# EAGLE board MC10_Tape (EAGLE 6.6.0)
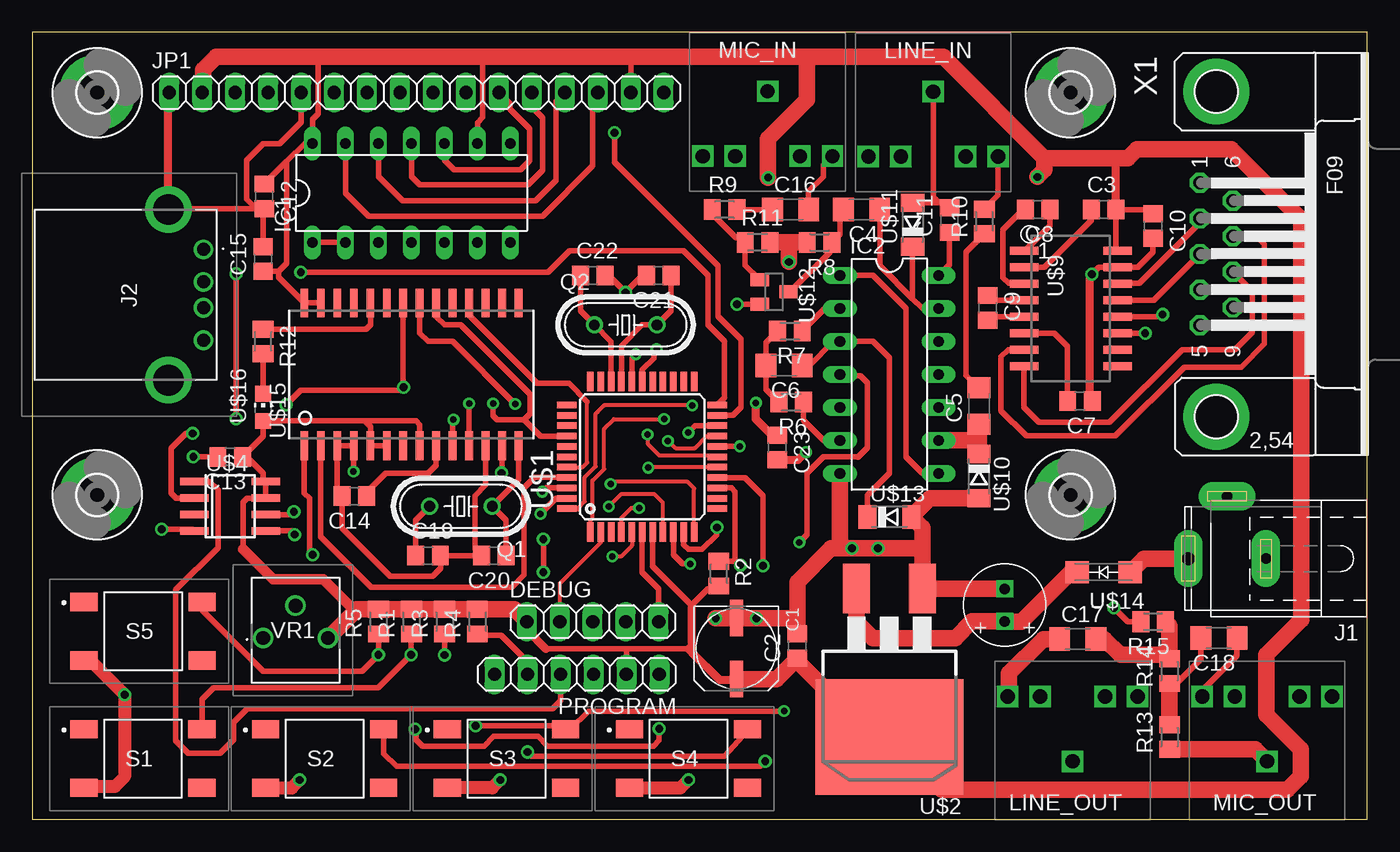
[diagram p0: board, top side]
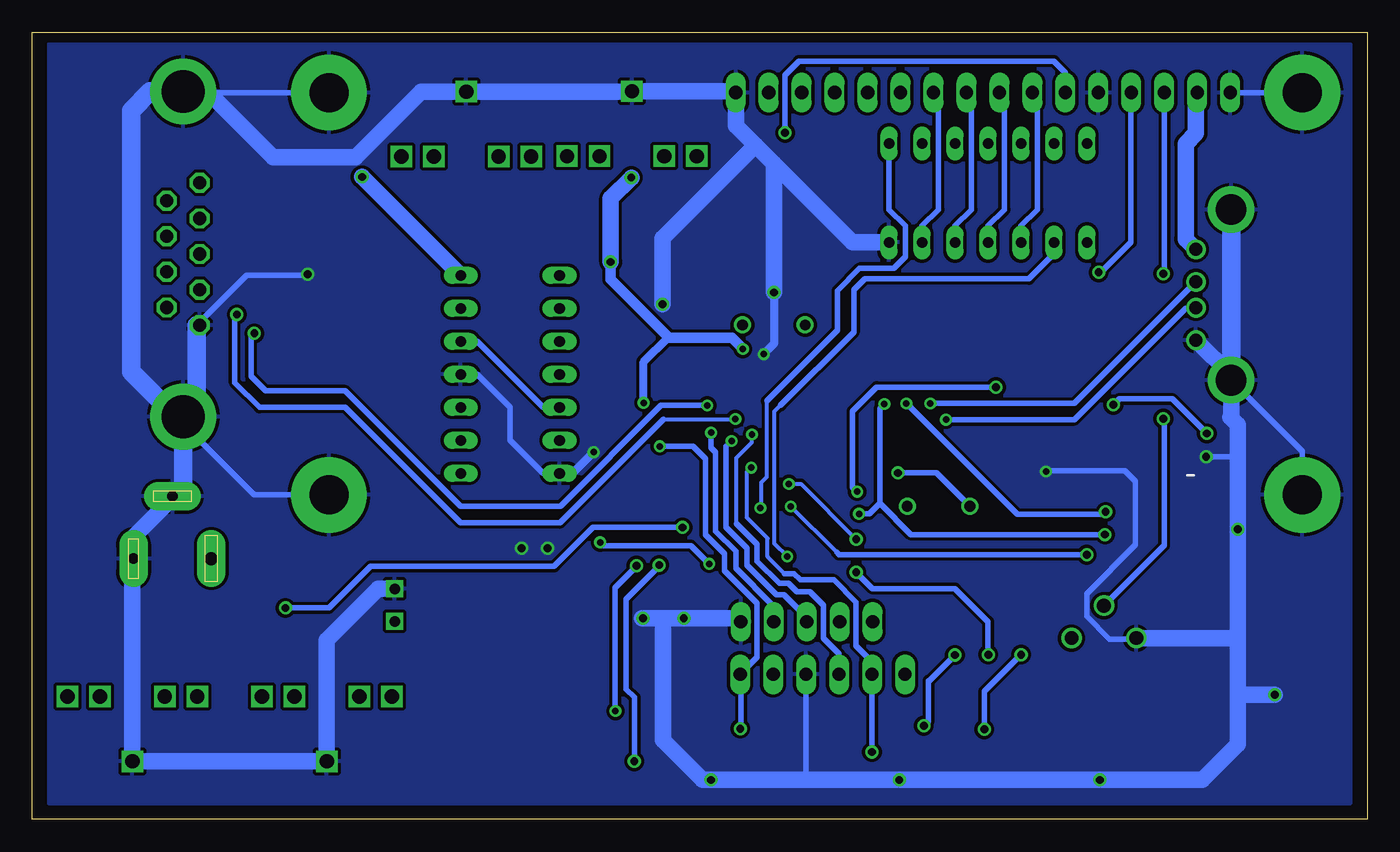
[diagram p1: board, bottom side, seen from below]

Size 102.85 x 60.63 mm. Coordinates in mm from the lower left corner, seen from the top.
Outline: 0,0 102.85,0 102.85,60.63 0,60.63 0,0
Copper layers (1*16): Top 0.035mm / dielectric 1.5mm / Bottom 0.035mm
Design rules "JLC": minimum track width 5mil, minimum drill 0.2mm, track to track 5mil, track to pad 0.2mm, pad to pad 5mil, via to via 0.54mm, smd to smd 0.003225mm, copper to edge 0.2mm, drill to drill 0.54mm, minimum pad ring 10mil, minimum via ring 8mil, stop-mask expansion 4mil, vias tented up to drill 0mil, thermal gap 10mil

## Footprints (pad centres in the part's own frame; a part is rotated, then mirrored left to right if it is on the bottom)
UD-6,3X5,8_NICHICON = smd 2.8 x 1: + 2.35,0; - -2.35,0
C0805 = smd 1.3 x 1.5: 1 -0.95,0; 2 0.95,0
C1206 = smd 1.6 x 1.8: 1 -1.4,0; 2 1.4,0
1X05 = drill 1.016 long: 1 -5.08,0; 2 -2.54,0; 3 0,0; 4 2.54,0; 5 5.08,0
3,0-PAD = drill 3 pad 5.842: B3,0 0,0
DIL14 = drill 0.813 long: 1 -7.62,-3.81; 2 -5.08,-3.81; 3 -2.54,-3.81; 4 0,-3.81; 5 2.54,-3.81; 6 5.08,-3.81; 7 7.62,-3.81; 8 7.62,3.81; 9 5.08,3.81; 10 2.54,3.81; 11 0,3.81; 12 -2.54,3.81; 13 -5.08,3.81; 14 -7.62,3.81
SPC4077 = drill 0.8 pad 2.184 long: 1 -3,0; 2 0,-4.8 | drill 1 pad 2.184 long: 3 3,0
875200010BLF = drill 1 pad 1.5: 1 0,0; 2 2.5,0; 3 4.5,0; 4 7,0 | drill 2.38 pad 3.57: MH1 -3.07,-2.71; MH2 10.07,-2.71
1X16 = drill 1.016 long: 1 -19.05,0; 2 -16.51,0; 3 -13.97,0; 4 -11.43,0; 5 -8.89,0; 6 -6.35,0; 7 -3.81,0; 8 -1.27,0; 9 1.27,0; 10 3.81,0; 11 6.35,0; 12 8.89,0; 13 11.43,0; 14 13.97,0; 15 16.51,0; 16 19.05,0
3.5_AUDIO = drill 1.1 square: RING 5,-5; RING_SWITCH 2.5,-5; SLEEVE 0,0; TIP -5,-5; TIP_SWITCH -2.5,-5
1X06 = drill 1.016 long: 1 -6.35,0; 2 -3.81,0; 3 -1.27,0; 4 1.27,0; 5 3.81,0; 6 6.35,0
HC49/S = drill 0.813: 1 -2.413,0; 2 2.413,0
M0805 = smd 1.3 x 1.6: 1 -0.95,0; 2 0.95,0
LL3301NF065QG = smd 2.1 x 1.4: 1 -4.55,2.25; 2 4.55,2.25; 3 -4.55,-2.25; 4 4.55,-2.25
TQFP44 = smd 1.5 x 0.5: 1 -5.8,4; 2 -5.8,3.2; 3 -5.8,2.4; 4 -5.8,1.6; 5 -5.8,0.8; 6 -5.8,0; 7 -5.8,-0.8; 8 -5.8,-1.6; 9 -5.8,-2.4; 10 -5.8,-3.2; 11 -5.8,-4; 23 5.8,-4; 24 5.8,-3.2; 25 5.8,-2.4; 26 5.8,-1.6; 27 5.8,-0.8; 28 5.8,0; 29 5.8,0.8; 30 5.8,1.6; 31 5.8,2.4; 32 5.8,3.2; 33 5.8,4 | smd 0.5 x 1.5: 12 -4,-5.8; 13 -3.2,-5.8; 14 -2.4,-5.8; 15 -1.6,-5.8; 16 -0.8,-5.8; 17 0,-5.8; 18 0.8,-5.8; 19 1.6,-5.8; 20 2.4,-5.8; 21 3.2,-5.8; 22 4,-5.8; 34 4,5.8; 35 3.2,5.8; 36 2.4,5.8; 37 1.6,5.8; 38 0.8,5.8; 39 0,5.8; 40 -0.8,5.8; 41 -1.6,5.8; 42 -2.4,5.8; 43 -3.2,5.8; 44 -4,5.8
D2PACK = smd 2.083 x 3.81: 1 -2.54,-8.89; 3 2.54,-8.89 | smd 11.43 x 8.89: 2 0,2.54
NXA_35V100_6.3X11 = drill 0.8 square: P$1 -1.25,0; P$2 1.25,0
SO08 = smd 0.6 x 2.2: 1 -1.905,-2.75; 2 -0.635,-2.75; 3 0.635,-2.75; 4 1.905,-2.75; 5 1.905,2.75; 6 0.635,2.75; 7 -0.635,2.75; 8 -1.905,2.75
SOP16 = smd 0.6 x 2.2: 1 -4.445,-3.6; 2 -3.175,-3.6; 3 -1.905,-3.6; 4 -0.635,-3.6; 5 0.635,-3.6; 6 1.905,-3.6; 7 3.175,-3.6; 8 4.445,-3.6; 9 4.445,3.6; 10 3.175,3.6; 11 1.905,3.6; 12 0.635,3.6; 13 -0.635,3.6; 14 -1.905,3.6; 15 -3.175,3.6; 16 -4.445,3.6
SOD80C = smd 1.4 x 1.8: A 1.7,0; C -1.7,0
SOT23 = smd 1 x 1.4: 1 -0.95,-1.1; 2 0.95,-1.1; 3 0,1.1
SMA-DO214AC = smd 1.8 x 1.7: A -2.05,0; K 2.05,0
SOP28 = smd 0.6 x 2.2: 1 -6.985,-5.5; 2 -5.715,-5.5; 3 -4.445,-5.5; 4 -3.175,-5.5; 5 -1.905,-5.5; 6 -0.635,-5.5; 7 0.635,-5.5; 8 1.905,-5.5; 9 3.175,-5.5; 10 4.445,-5.5; 11 5.715,-5.5; 12 6.985,-5.5; 13 8.255,-5.5; 14 9.525,-5.5; 15 9.525,5.5; 16 8.255,5.5; 17 6.985,5.5; 18 5.715,5.5; 19 4.445,5.5; 20 3.175,5.5; 21 1.905,5.5; 22 0.635,5.5; 23 -0.635,5.5; 24 -1.905,5.5; 25 -3.175,5.5; 26 -4.445,5.5; 27 -5.715,5.5; 28 -6.985,5.5
CHIP-LED0805 = smd 1.2 x 1.2: A 0,-1.05; C 0,1.05
3306P1104 = drill 1.05 pad 1.575: 1 0,0; 2 2.5,2.5; 3 5,0
F09HP = drill 1.016 octagon: 1 -5.486,-1.27; 2 -2.743,-1.27; 3 0,-1.27; 4 2.743,-1.27; 5 5.486,-1.27; 6 -4.115,1.27; 7 -1.372,1.27; 8 1.372,1.27; 9 4.115,1.27 | drill 3.302 pad 5.08: G1 -12.522,0; G2 12.522,0

## Placement (x,y rotation side)
C1  [UD-6,3X5,8_NICHICON]  54.24,13.16 270 top
C2  104  [C0805]  58.94,13.37 90 top
C3  104  [C0805]  82.55,46.99 0 top
C4  106  [C1206]  63.9,46.99 180 top
C5  106  [C1206]  72.94,31.85 90 top
C6  106  [C1206]  57.92,34.97 180 top
C7  104  [C0805]  80.72,32.24 180 top
C8  104  [C0805]  77.47,46.99 180 top
C9  104  [C0805]  73.61,39.42 270 top
C10  104  [C0805]  86.36,45.72 270 top
C11  104  [C0805]  70.67,46.17 90 top
C12  104  [C0805]  17.87,48.01 270 top
C13  104  [C0805]  15.24,27.94 180 top
C14  104  [C0805]  24.81,24.91 180 top
C15  104  [C0805]  17.78,43.18 90 top
C16  106  [C1206]  58.42,46.99 0 top
C17  106  [C1206]  80.55,13.9 0 top
C18  106  [C1206]  91.44,13.97 180 top
C19  22p  [C0805]  30.48,20.32 0 top
C20  22p  [C0805]  35.56,20.32 180 top
C21  22p  [C0805]  48.26,41.91 180 top
C22  22p  [C0805]  43.18,41.91 0 top
C23  104  [C0805]  57.4,28.66 270 top
DEBUG  [1X05]  43.18,15.24 0 top
H1  MOUNT-PAD-ROUND3.0  [3,0-PAD]  80,25 0 top
H2  MOUNT-PAD-ROUND3.0  [3,0-PAD]  80,56 0 top
H3  MOUNT-PAD-ROUND3.0  [3,0-PAD]  5,25 0 top
H4  MOUNT-PAD-ROUND3.0  [3,0-PAD]  5,56 0 top
IC1  74164N  [DIL14]  29.21,48.26 0 top
IC2  7414N  [DIL14]  66.04,34.29 270 top
J1  [SPC4077]  92.06,20.1 180 top
J2  87520-0010BLF  [875200010BLF]  13.19,43.92 270 top
JP1  [1X16]  29.6,56 0 top
LINE_IN  3.5_AUDIO  [3.5_AUDIO]  69.42,56.07 0 top
LINE_OUT  3.5_AUDIO  [3.5_AUDIO]  80.16,4.48 180 top
MIC_IN  3.5_AUDIO  [3.5_AUDIO]  56.65,56.1 0 top
MIC_OUT  3.5_AUDIO  [3.5_AUDIO]  95.15,4.48 180 top
PROGRAM  [1X06]  41.96,11.18 180 top
Q1  [HC49/S]  33.02,24.13 180 top
Q2  [HC49/S]  45.72,38.1 0 top
R1  1k  [M0805]  29.21,15.24 90 top
R2  1k  [M0805]  52.89,18.94 270 top
R3  1k  [M0805]  31.77,15.24 90 top
R4  1k  [M0805]  34.29,15.24 90 top
R5  1k  [M0805]  26.67,15.24 90 top
R6  1k  [M0805]  58.47,32.16 180 top
R7  1k  [M0805]  58.37,37.63 180 top
R8  470  [M0805]  60.66,44.45 180 top
R9  470  [M0805]  53.34,46.99 0 top
R10  470  [M0805]  73.36,46.07 90 top
R11  120k  [M0805]  55.88,44.45 0 top
R12  470  [M0805]  17.78,36.83 270 top
R13  1k  [M0805]  87.63,6.35 90 top
R14  4k7  [M0805]  87.63,11.43 90 top
R15  10k  [M0805]  86.36,15.24 180 top
S1  LL3301NF065QG  [LL3301NF065QG]  8.52,4.69 0 top
S2  LL3301NF065QG  [LL3301NF065QG]  22.52,4.69 0 top
S3  LL3301NF065QG  [LL3301NF065QG]  36.53,4.69 0 top
S4  LL3301NF065QG  [LL3301NF065QG]  50.56,4.69 0 top
S5  LL3301NF065QG  [LL3301NF065QG]  8.53,14.5 0 top
U$1  PIC16F747-IPT  [TQFP44]  46.99,27.94 90 top
U$2  LM1086  [D2PACK]  66.04,8.89 180 top
U$3  NXA_35V100_6.3X11  [NXA_35V100_6.3X11]  74.93,16.51 270 top
U$4  23LC512T-ISN  [SO08]  15.24,24.13 270 top
U$9  SP232  [SOP16]  80.01,39.37 270 top
U$10  ZMM2V2  [SOD80C]  72.94,26.45 270 top
U$11  ZMM2V2  [SOD80C]  67.83,45.82 90 top
U$12  PMBT3904  [SOT23]  57.15,40.64 270 top
U$13  ZMM2V2  [SOD80C]  66.04,23.31 0 top
U$14  SS24  [SMA-DO214AC]  82.55,19.05 180 top
U$15  CH376S  [SOP28]  27.94,34.29 0 top
U$16  LED_0805  [CHIP-LED0805]  17.78,31.75 0 top
VR1  3306P-1-473  [3306P1104]  17.78,13.97 0 top
X1  [F09HP]  91.23,43.56 270 top

## Library data of the parts
C1-C23 R1-R15 = rcl
DEBUG JP1 PROGRAM = pinhead
H1-H4 = holes
IC1 IC2 = 74xx-us
J1 = con-jack; OC_FARNELL: unknown; OC_NEWARK: unknown
J2 = Signetics; DESCRIPTION: USB 2.0 Type A receptacle white; HEIGHT: 7.8mm; MANUFACTURER_NAME: Amphenol; MANUFACTURER_PART_NUMBER: 87520-0010BLF; MOUSER_PART_NUMBER: 649-87520-0010BLF; MOUSER_PRICE-STOCK: https://www.mouser.co.uk/ProductDetail/Amphenol-FCI/87520-0010BLF?qs=x6EjVpvqMVP%2F2to87x7cdQ%3D%3D
LINE_IN LINE_OUT MIC_IN MIC_OUT U$1-U$4 U$9-U$16 = Signetics
Q1 Q2 = crystal; OC_FARNELL: 1667008; OC_NEWARK: unknown
S1-S5 = Signetics; DESCRIPTION: E-SWITCH - LL3301NF065QG - TACTILE SW, SPST, 0.05A, 12VDC, SOLDER; HEIGHT: 4mm; MANUFACTURER_NAME: E-Switch; MANUFACTURER_PART_NUMBER: LL3301NF065QG; MOUSER_PART_NUMBER: 612-LL3301NF065QG; MOUSER_PRICE-STOCK: https://www.mouser.co.uk/ProductDetail/E-Switch/LL3301NF065QG?qs=QtyuwXswaQiWhwgY68YTTw%3D%3D
VR1 = Signetics; DESCRIPTION: Trimmer Resistors - Through Hole TRIMMER -SMD 6MM RD ST CERMET OPEN FRAME; HEIGHT: 8.38mm; MANUFACTURER_NAME: Bourns; MANUFACTURER_PART_NUMBER: 3306P-1-473; MOUSER_PART_NUMBER: 652-3306P-1-473; MOUSER_PRICE-STOCK: https://www.mouser.co.uk/ProductDetail/Bourns/3306P-1-473?qs=BJlw7L4Cy79OzIXLuBSy4A%3D%3D
X1 = Signetics; OC_FARNELL: unknown; OC_NEWARK: unknown

## Nets
5V0: C1.+ C2.1 C3.2 C10.1 C11.1 C12.1 C13.1 C15.1 C23.1 DEBUG.1 IC1.9 IC1.14 IC2.14 J2.1 JP1.2 JP1.15 PROGRAM.2 R1.2 R2.2 R3.2 R4.2 R5.2 R8.2 R11.2 U$1.7 U$1.28 U$2.2 U$4.7 U$4.8 U$9.16 U$15.5 U$15.6 U$15.8 U$15.27 U$15.28 U$16.A VR1.3
CTS: U$9.10
D0: IC1.3 JP1.7
D1: IC1.4 JP1.8
D2: IC1.5 JP1.9
D3: IC1.6 JP1.10
D4: IC1.10 JP1.11
D5: IC1.11 JP1.12
D6: IC1.12 JP1.13
D7: IC1.13 JP1.14
DEBUG: DEBUG.2 U$1.2
DISP_CLK: IC1.8 U$1.4
DISP_DATA: IC1.1 IC1.2 U$1.5
E: JP1.6 U$1.21
GND: C1.- C2.2 C7.1 C10.2 C11.2 C12.2 C13.2 C14.2 C15.2 C19.2 C20.2 C21.2 C22.2 C23.2 DEBUG.5 H1.B3,0 H2.B3,0 H3.B3,0 H4.B3,0 IC1.7 IC2.7 IC2.11 J1.1 J1.2 J2.4 J2.MH1 J2.MH2 JP1.1 JP1.5 JP1.16 LINE_IN.SLEEVE LINE_OUT.SLEEVE MIC_IN.SLEEVE MIC_OUT.SLEEVE PROGRAM.3 R13.1 S1.3 S2.3 S3.3 S4.3 S5.3 U$1.6 U$1.29 U$2.1 U$3.P$1 U$4.4 U$9.15 U$10.A U$11.A U$12.2 U$13.A U$15.3 U$15.4 U$15.12 VR1.1 X1.5 X1.G1 X1.G2
LINE_IN: LINE_IN.RING R10.2
LINE_OUT: C17.1 LINE_OUT.RING
MIC_IN: C16.2 MIC_IN.RING
MIC_OUT: C18.1 MIC_OUT.RING
MISO: U$1.42 U$4.2 U$15.22
MOSI: U$1.43 U$4.5 U$15.21
N$1: C5.1 IC2.9 U$10.C
N$2: U$2.3 U$3.P$2 U$14.K
N$3: C6.1 IC2.3 U$13.C
N$4: IC2.1 IC2.8
N$5: IC2.5 IC2.12
N$6: C14.1 U$15.9
N$7: C4.2 R8.1 U$12.3
N$8: C4.1 IC2.13 U$11.C
N$9: R9.1 R11.1 U$12.1
N$10: C17.2 R14.2 R15.1
N$11: R12.2 U$16.C
N$12: C16.1 R9.2
N$13: IC2.6 R6.1
N$14: C6.2 R6.2 R7.2
N$15: IC2.2 R7.1
N$16: C18.2 R13.2 R14.1
N$17: C21.1 Q2.2 U$1.30
N$18: C20.1 Q1.1 U$15.14
N$19: C19.1 Q1.2 U$15.13
N$20: C22.1 Q2.1 U$1.31
N$21: R12.1 U$15.24
N$58: J1.3 U$14.A
N$59: C8.2 U$9.3
N$60: C8.1 U$9.1
N$61: C9.2 U$9.5
N$62: C9.1 U$9.4
N$64: C3.1 U$9.2
N$65: C7.2 U$9.6
N$68: C5.2 R10.1
RS: JP1.4 U$1.22
RS232_CTS: U$9.7 X1.7
RS232_RTS: U$9.8 X1.8
RS232_RXD: U$9.13 X1.3
RS232_TXD: U$9.14 X1.2
RTS: U$9.9
RXD: U$1.1 U$9.12
S_RX: DEBUG.4 U$1.20
S_TX: DEBUG.3 U$1.19
SCK: U$1.37 U$4.6 U$15.20
SW0: R1.1 S1.2 U$1.11
SW1: R2.1 S2.2 U$1.14
SW2: R3.1 S3.2 U$1.15
SW3: PROGRAM.5 R4.1 S4.2 U$1.16
TAPE_IN: IC2.4 U$1.9
TAPE_OUT: R15.2 U$1.10
TXD: U$1.44 U$9.11
USB_CS: U$1.40 U$15.18
USB_D+: J2.3 U$15.10
USB_D-: J2.2 U$15.11
USB_INT: U$1.8 U$15.1
USB_RST: U$1.41 U$15.2
V0: JP1.3 VR1.2
~RAM_CS: PROGRAM.4 U$1.17 U$4.1
~RESET: PROGRAM.1 R5.1 S5.2 U$1.18

## Tracks (layer width: path | path; a pad name or v marks a point on that pad's centre or on a via)
5V0  (via drill 0.5, 0.5 pad 0.25, 0.6)
  Top 0.406: JP1.15 46.11,58.46 46.4,58.75 | IC1.9 34.29,53.69 34.7,54.1 34.7,58.6 34.55,58.75 | JP1.2 13.19,55.9 | 19.6,50.69 20.98,52.07 IC1.14 21.59,53.94 22,54.35 22,58.7 22.05,58.75 | 19.6,50.69 C12.1 | C15.1 18.98,42.23 | 18.98,42.23 19.6,42.85 19.6,50.69 | C11.1 70.67,42.73 IC2.14 | U$15.27 U$15.28 18.98,41.77 18.98,42.23 | 25.7,30.6 25.6,30.7 U$16.A 17.78,29.53 C13.1 16.51,27.94 17.78,26.67 17.78,26.25 U$4.8 U$4.7 16.57,24.77 16.25,24.45 16.25,20.8 | 25.7,30.6 26.05,30.25 26.05,28.8 U$15.5 U$15.6 | U$15.8 29.84,30.41 29.55,30.7 25.8,30.7 25.7,30.6 | U$1.7 47.79,19.52 50.8,16.51 52.07,17.78 52.68,17.78 R2.2 | 54.18,10.75 C1.+ | DEBUG.1 38.1,14.6 | U$1.28 46.99,34.64 47.9,35.55 47.9,36.05 v48.1,36.25 | U$9.16 83.5,43.92 C3.2 86.04,46.99 C10.1 | 39.55,13.15 45.72,13.15 | 45.72,13.15 50.55,13.15 | PROGRAM.2 45.77,13.1 45.72,13.15
  Top 0.61: 50.8,16.51 50.8,12.9 | 50.8,12.9 52.95,10.75 54.18,10.75 | 38.1,14.6 39.55,13.15 | C23.1 56.99,29.61 55.75,30.85 v55.75,32.1 | C3.2 83.5,50.63 83.82,50.95 | 50.55,13.15 50.8,12.9
  Top 0.813: 24.86,16.05 22.4,18.5 19.25,18.5 18.55,18.5 16.25,20.8
  Top 1.27: C1.+ 57.33,10.81 C2.1 58.94,12.18 64.77,6.35 U$2.2 70.09,2.3 96.7,2.3 97.75,3.35 97.75,5.4 95.1,8.05 95.1,12.7 97.8,15.4 97.8,46.25 92.4,51.65 85.1,51.65 84.4,50.95 83.82,50.95 78,50.95 | VR1.3 24.86,16.05 25,16.19 R5.2 R1.2 R3.2 R4.2 37.15,16.19 DEBUG.1 | 78,50.95 70.2,58.75 59.69,58.75 | 59.69,58.75 46.4,58.75 34.55,58.75 22.05,58.75 14.15,58.75 13.15,57.75 13.15,56.06 JP1.2 | v56.7,49.45 56.7,52.45 59.69,55.44 59.69,58.75 | R11.2 58.42,44.45 | 58.42,44.45 R8.2 | v58.3,42.95 58.3,44.33 58.42,44.45 | 78,50.95 78,50.05 v77.45,49.5
  Bottom 0.406: 13.19,55.9 JP1.2
  Bottom 0.61: v55.75,32.1 55.75,35.25 53.85,37.15
  Bottom 0.813: v58.3,42.95 58.3,41.6 53.85,37.15 53.8,37.1 48.95,37.1 v48.1,36.25
  Bottom 1.27: v58.3,42.95 58.3,47.85 v56.7,49.45 | v77.45,49.5 v77.44,49.5 IC2.14 | 13.19,55.9 13.19,52.85 13.97,52.07 13.97,44.7 J2.1
D0
  Bottom 0.406: IC1.3 26.67,45.72 25.4,46.99 25.4,55.61 JP1.7
D1
  Bottom 0.406: IC1.4 29.21,45.72 27.94,46.99 27.94,55.61 JP1.8
D2
  Bottom 0.406: IC1.5 31.75,45.72 30.48,46.99 30.48,55.61 JP1.9
D3
  Bottom 0.406: IC1.6 34.29,45.72 33.02,46.99 33.02,55.61 JP1.10
D4
  Top 0.406: JP1.11 36.8,55.15 36.8,54.7 38.3,53.2 38.3,50.75 37.6,50.05 32.5,50.05 31.75,50.8 IC1.10
D5
  Top 0.406: JP1.12 38.6,55.89 38.6,54.75 39.3,54.05 39.3,50 38.2,48.9 29.84,48.9 29.21,49.53 IC1.11
D6
  Top 0.406: JP1.13 40.35,55.32 40.35,49.25 38.76,47.66 28.54,47.66 26.67,49.53 IC1.12
D7
  Top 0.406: JP1.14 43.18,55.61 43.18,50.35 39.32,46.49 25.9,46.49 24.13,48.26 IC1.13
DEBUG
  Top 0.305: DEBUG.2 40.64,18.19 43.8,21.35 U$1.2
DISP_CLK  (via drill 0.5)
  Top 0.305: U$1.4 45.39,23.24 46.15,24 v46.75,24
  Bottom 0.305: 46.25,32.25 46.25,26.4 46.7,25.95 46.7,24.05 v46.75,24
  Bottom 0.406: IC1.8 36.83,46.99 35.56,45.72 35.56,43.34 36.45,42.45 39.1,42.45 40.8,40.75 40.8,37.7 46.25,32.25
DISP_DATA  (via drill 0.5)
  Top 0.305: U$1.5 46.19,21.09 45.35,20.25 v44.69,20.25 v44.68,20.26
  Top 0.406: IC1.1 IC1.2
  Bottom 0.305: 45.2,31.9 45.7,31.4 45.7,21.28 v44.68,20.26
  Bottom 0.406: IC1.2 24.13,43.57 26.05,41.65 38.7,41.65 39.55,40.8 39.55,37.55 45.2,31.9
E  (via drill 0.6)
  Top 0.406: U$1.21 54,31.14 54.61,31.75 54.61,36.99 52.85,38.75 52.85,42.65 44.85,50.65 v44.85,52.9
  Bottom 0.406: JP1.6 23.25,57.54 24.13,58.42 43.78,58.42 44.85,57.35 v44.85,52.9
GND  (via drill 0.5, 0.6)
  Top 0.406: C15.2 17.78,46.97 C12.2 | JP1.5 20.71,53.73 19.05,52.07 17.78,52.07 16.51,50.8 16.51,47.79 17.3,47 17.81,47 C12.2 | 10.48,55.93 JP1.1 | C12.2 10.55,47.06 J2.MH1 | U$11.A 69.85,47.52 | 69.85,47.52 70.27,47.52 C11.2 | LINE_IN.SLEEVE 69.42,47.95 69.85,47.52 | C20.2 C19.2 31.45,20.3 31.45,19.35 30.85,18.75 27.55,18.75 23.86,22.44 C14.2 23.5,25.27 U$15.3 U$15.4 24.75,28.77 v24.75,26.8 | U$1.6 46.99,19.05 48.26,17.78 DEBUG.5 | U$12.2 v54.3,39.7 | C22.2 44.39,41.91 v45.7,40.6 47.01,41.91 C21.2 | U$15.12 34.92,25.77 34.1,24.95 34.1,20.83 C20.2 | 34.29,20.64 C20.2 | v9.95,22.35 12.37,22.35 U$4.4 | C13.2 v12.41,27.94 v12.4,27.95 | U$1.29 46.19,35.54 v46.5,35.85 | C10.2 86.36,43.71 85.2,42.55 U$9.15 82.2,42.55 v81.65,42 81.67,41.98
  Top 0.61: J2.MH1 10.48,55.93 | C23.2 59.01,27.71 v59.6,28.3 | 81.67,41.98 81.45,41.76 81.45,32.46 C7.1
  Top 1.016: S2.3 19.99,2.44 v20.6,3.05 | v36.05,3.05 35.44,2.44 S3.3 | S4.3 49.94,2.44 v50.55,3.05 | S1.3 4.07,2.54 6.35,2.54 7.11,3.3 v7.11,9.6 4.46,12.25 S5.3
  Top 1.27: U$3.P$1 68.6,17.76 U$2.1 68.58,21 | 68.58,21 68.58,22.47 U$13.A 69.18,24.75 U$10.A | C2.2 58.94,15.65 | 58.94,15.65 58.94,18.29 61.55,20.9 62.23,20.9 | 62.23,20.9 v63.15,20.9 v65.15,20.9 68.48,20.9 68.58,21 | IC2.7 62.23,20.9 | R13.1 94.23,5.4 MIC_OUT.SLEEVE | 58.94,15.65 58.79,15.5 v55.8,15.5 | v55.8,15.5 v52.65,15.5 | v55.8,15.5 C1.-
  Bottom 0.406: v12.4,27.95 9.96,27.95 9.95,27.94 | VR1.1 17.85,13.9 19.85,13.9 21.6,15.65 21.6,17.4 17.85,21.15 17.85,26.05 18.65,26.85 24.7,26.85 v24.75,26.8 | H3.B3,0 5,28.37 J2.MH2 | H4.B3,0 JP1.1 | H2.B3,0 91.15,56 X1.G1 | H1.B3,0 85.75,25 91.23,30.48 | IC2.11 68.58,34.29 66.04,31.75 66.04,29.21 63.5,26.67 IC2.7 | PROGRAM.3 43.23,3.1 43.18,3.05 | X1.5 89.96,38.31 86.36,41.91 81.74,41.91 v81.65,42
  Bottom 0.61: IC2.7 61.23,26.67 v59.6,28.3 | v45.7,40.6 45.7,36.65 v46.5,35.85
  Bottom 1.27: J1.2 92.06,24.78 95.25,21.59 95.25,20.29 J1.1 95.15,20.01 MIC_OUT.SLEEVE LINE_OUT.SLEEVE 80.16,13.82 76.2,17.78 74.95,17.78 U$3.P$1 | X1.5 90.2,38.07 | X1.G1 89.38,56.08 84.3,51 77.95,51 72.9,56.05 71.2,56.05 71.18,56.07 LINE_IN.SLEEVE 56.68,56.07 MIC_IN.SLEEVE 48.75,56.1 JP1.16 48.65,53.45 47.13,51.93 | IC1.7 39.65,44.45 45.7,50.5 | 45.7,50.5 47.13,51.93 | v45.7,40.6 45.7,50.5 | 9.95,13.97 v9.95,22.35 9.95,27.94 9.95,30.4 10.55,31 10.48,31.07 J2.MH2 | 9.95,13.97 9.95,9.5 | 9.95,9.5 9.95,5.8 12.7,3.05 v20.6,3.05 v36.05,3.05 43.18,3.05 v50.55,3.05 51.2,3.05 54.25,6.1 C1.- 52.72,15.5 v52.65,15.5 | VR1.1 9.95,13.97 | v7.11,9.6 9.85,9.6 9.95,9.5 | v54.3,39.7 54.3,44.76 47.13,51.93 | 10.48,34.21 J2.4 | v52.65,15.5 48.52,15.5 DEBUG.5 | 55.87,15.5 v52.65,15.5
  Bottom 1.422: J2.MH2 10.48,34.21 J2.MH1 | J1.2 91.23,24.9 91.23,30.48 | 91.23,30.48 X1.G2 90.2,32.07 90.2,38.07 | X1.G1 93.78,56.08 95.25,54.61 95.25,34.5 91.23,30.48
  pour Bottom (isolate 0.254): 1.27,59.69 101.6,59.69 101.6,1.27 1.27,1.27
LINE_IN
  Top 0.406: LINE_IN.RING 74.42,48.08 R10.2
LINE_OUT
  Top 1.27: C17.1 77.9,13.9 75.25,11.25 75.25,9.57 LINE_OUT.RING
MIC_IN
  Top 0.406: C16.2 59.82,48.39 60.96,49.53 60.96,50.41 MIC_IN.RING
MIC_OUT
  Top 0.406: MIC_OUT.RING 90.15,9.95 92.8,12.6 92.8,13.93 C18.1
MISO  (via drill 0.5, 0.6)
  Top 0.406: U$4.2 11.09,24.77 10.7,25.15 10.7,28.6 11.84,29.74 v12.35,29.74 | v19.55,31.95 20.65,33.05 28.35,33.05 v28.6,33.3 28.57,33.33 U$15.22 | U$1.42 39.59,25.54 v39.3,25.25
  Bottom 0.406: v12.35,29.74 15.01,32.4 19.1,32.4 v19.55,31.95 | v28.6,33.3 37.8,33.3 39.65,31.45 39.65,25.6 v39.3,25.25
MOSI  (via drill 0.5 pad 0.25, 0.6 pad 0.25)
  Top 0.406: U$4.5 19.93,22.23 v20.2,21.95 | U$15.21 29.84,37.47 30.48,36.83 32.37,36.83 v37.2,32 | U$1.43 40.34,24.74 v39.15,23.55
  Bottom 0.406: v20.2,21.95 35.15,21.95 37.55,24.35 | 37.55,24.35 37.55,31.65 v37.2,32 | v39.15,23.55 38.35,23.55 37.55,24.35
N$1
  Top 1.27: U$10.C 72.94,29.21 | 72.94,29.21 C5.1 | IC2.9 72.94,29.21
N$2
  Top 1.27: U$14.K 80.01,19.05 76.2,15.24 74.95,15.24 U$3.P$2 72.41,15.26 71.12,13.97 64.77,13.97 63.5,15.24 U$2.3
N$3
  Top 0.406: C6.1 59.87,34.97 61.7,36.8 62.2,36.8 IC2.3 64.77,36.83 66.04,35.56 66.04,26.67 64.34,24.97 U$13.C
N$4
  Top 0.406: IC2.1 64.77,41.91 67.31,39.37 67.31,27.94 68.58,26.67 IC2.8
N$5
  Bottom 0.406: IC2.5 63.5,31.75 68.58,36.83 IC2.12
N$6
  Top 0.406: U$15.9 31.11,27.3 30.48,26.67 27.22,26.67 25.76,25.21 C14.1
N$7
  Top 0.406: C4.2 62.23,46.72 62.23,45.07 R8.1 61.45,44.29 61.45,43.7 58.39,40.64 U$12.3
N$8
  Top 0.406: C4.1 65.3,42.65 67.83,40.12 | 67.83,40.12 68.58,39.37 IC2.13 | U$11.C 67.83,40.12
N$9
  Top 0.406: R9.1 52.39,46.61 54.2,44.8 54.58,44.8 R11.1 54.93,42.71 U$12.1
N$10
  Top 1.27: R15.1 87.63,14.92 R14.2 87.31,12.7 83.82,12.7 82.62,13.9 C17.2
N$11
  Top 0.406: R12.2 U$16.C
N$12
  Top 0.406: C16.1 R9.2
N$13
  Top 0.406: IC2.6 60.94,29.21 59.4,30.75 59.4,32.14 R6.1
N$14
  Top 0.406: R7.2 56.52,36.73 C6.2 56.52,33.16 R6.2
N$15
  Top 0.406: IC2.2 61.06,39.37 R7.1
N$16
  Top 0.406: R14.1 88.18,10.48 90.05,12.35 C18.2
  Top 1.27: R13.2 R14.1
N$17
  Top 0.406: C21.1 49.21,39.18 Q2.2 46.99,38.1 45.39,36.5 U$1.30
N$18
  Top 0.406: U$15.14 37.47,26.16 Q1.1 36.51,23.05 C20.1
N$19  (via drill 0.6)
  Top 0.406: C19.1 29.53,23.05 Q1.2 | U$15.13 36.2,26.75 v36.15,26.7
  Bottom 0.406: v36.15,26.7 33.18,26.7 Q1.2
N$20
  Top 0.406: U$1.31 44.59,36.82 Q2.1 42.23,39.18 C22.1
N$21
  Top 0.406: R12.1 25.73,37.78 26.05,38.1 26.05,39.77 U$15.24
N$58
  Top 1.27: J1.3 85.65,20.1 U$14.A
N$59
  Top 0.406: C8.2 76.34,46.99 74.8,45.45 74.8,41.75 75.25,41.3 76.39,41.3 U$9.3
N$60
  Top 0.406: U$9.1 76.47,43.81 78.4,45.75 78.4,46.97 C8.1
N$61
  Top 0.406: U$9.5 73.88,38.73 C9.2
N$62
  Top 0.406: U$9.4 73.97,40.01 C9.1
N$64
  Top 0.406: U$9.2 78,42.55 81.6,46.15 C3.1
N$65
  Top 0.406: U$9.6 78.73,37.47 79.75,36.45 79.75,32.26 C7.2
N$68
  Top 0.406: R10.1 71.95,43.71 71.95,34.24 C5.2
RS  (via drill 0.6 pad 0.25)
  Top 0.406: v20.68,42.15 39.75,42.15 41.4,43.8 50.18,43.8 52.07,41.91 52.07,38.1 53.34,36.83 53.34,32.49 U$1.22
  Bottom 0.406: JP1.4 18.2,55.97 18.2,44.45 20.5,42.15 v20.68,42.15
RS232_CTS
  Top 0.406: U$9.7 75.19,36.2 74.65,35.65 74.65,31.5 76.6,29.55 83.45,29.55 88.75,34.85 93.15,34.85 94.95,36.65 94.95,44.3 94.3,44.95 92.52,44.95 X1.7
RS232_RTS
  Top 0.406: U$9.8 76.41,31.74 77.55,30.6 83,30.6 88.6,36.2 92.65,36.2 94,37.55 94,40.69 X1.8
RS232_RXD
  Top 0.406: U$9.13 86.41,40.01 X1.3
RS232_TXD
  Top 0.406: X1.2 89.96,45.96 85.3,41.3 83.64,41.3 U$9.14
RXD  (via drill 0.5, 0.6)
  Top 0.305: v48.68,30.85 44.8,30.85 44.05,30.1 44.05,27 43.15,26.1 43.15,23.2 42.99,23.04 U$1.1
  Top 0.406: U$9.12 86.94,38.73 v87.1,38.9
  Bottom 0.305: 54.2,30.85 v48.68,30.85
  Bottom 0.406: v87.1,38.9 87.25,38.75 87.25,33.65 85.35,31.75 78.74,31.75 69.85,22.86 62.23,22.86 62.23,22.87 62.18,22.87 54.2,30.85
S_RX  (via drill 0.5 pad 0.25)
  Top 0.406: U$1.20 51.04,30.34 v50.55,29.8
  Bottom 0.406: DEBUG.4 45.72,16.51 45.81,16.51 48.65,19.35 48.65,20.65 50.2,22.2 50.2,28.3 50.55,28.65 v50.55,29.8
S_TX  (via drill 0.5 pad 0.25)
  Top 0.305: v48.97,29.15 49.57,28.6 51.05,28.6 52,29.55 U$1.19
  Bottom 0.406: DEBUG.3 43.18,15.53 44.95,17.3 45.5,17.3 47.8,19.6 47.8,20.9 49.4,22.5 49.4,28.77 v48.97,29.15
SCK  (via drill 0.5 pad 0.25, 0.6 pad 0.25)
  Top 0.406: U$1.37 39.16,29.54 37.9,30.8 | 37.9,30.8 35.8,30.8 35.5,31.1 v35.5,32.05 | U$15.20 31.11,38.73 31.75,38.1 33,38.1 38.35,32.75 38.35,31.25 37.9,30.8 | U$4.6 19.95,23.5 v20.15,23.7
  Bottom 0.406: v35.5,32.05 26.95,23.5 20.35,23.5 v20.15,23.7
SW0  (via drill 0.5, 0.6)
  Top 0.305: U$1.11 50.99,25.51 50.5,26 44.7,26 v44.55,25.85
  Top 0.406: v39.37,21.59 v39.37,19.05 | R1.1 29.19,14.27 v29.19,12.7 26.65,10.16 13.97,10.16 13.07,9.26 S1.2
  Bottom 0.305: v44.55,25.85 43.63,25.85 v39.37,21.59
  Bottom 0.406: v39.37,19.05 38.1,17.78 31.75,17.78 29.21,15.24 29.21,12.72 v29.19,12.7
SW1  (via drill 0.6)
  Top 0.406: U$1.14 53.86,25.54 54.15,25.25 54.15,20 v54.55,19.6 54.26,19.89 R2.1 | v56.47,4.49 56.08,4.1 28.05,4.1 27.07,5.08 S2.2
  Bottom 0.406: v54.55,19.6 54.55,19.5 57.1,16.95 57.1,10.05 56.45,9.4 56.45,4.61 v56.47,4.49
SW2  (via drill 0.5, 0.6)
  Top 0.406: U$1.15 54.91,26.34 56.3,24.95 v56.3,19.55 | S3.2 41.44,6.94 42.85,8.35 v57.92,8.35 | S3.2 41.08,7.18 | v34.16,7.22 40.8,7.22 S3.2 | R3.1 v31.77,12.68 v31.76,12.67
  Bottom 0.406: v56.3,19.55 56.3,19.5 57.95,17.85 57.95,8.38 v57.92,8.35 | v34.16,7.22 33.8,7.58 33.8,10.7 33.73,10.7 v31.76,12.67
SW3  (via drill 0.5, 0.6)
  Top 0.305: U$1.16 47.49,27.14 v47.45,27.1
  Top 0.406: PROGRAM.5 38.15,12.15 36.1,14.2 34.38,14.2 R4.1 | S4.2 55.11,6.85 53.34,4.88 38.47,4.88 v38.15,5.2
  Bottom 0.305: 44.9,18.95 46.2,20.25 46.2,21.65 47.8,23.25 47.8,26.75 v47.45,27.1
  Bottom 0.406: 44.9,18.95 44.15,18.95 43.65,18.45 41.1,18.45 39.4,16.75 39.4,13.4 38.15,12.15 PROGRAM.5 v38.15,5.2
TAPE_IN  (via drill 0.5)
  Top 0.406: IC2.4 62.32,34.2 63.8,34.2 64.35,33.65 64.35,28.65 63.6,27.9 63.56,27.94 60.96,27.94 59.69,26.67 59.69,21.94 v59.1,21.35 | U$1.9 49.39,20.41 50.1,19.7 v50.7,19.7
  Bottom 0.406: v50.7,19.7 52.1,21.1 58.85,21.1 v59.1,21.35
TAPE_OUT  (via drill 0.6)
  Top 0.406: U$1.10 50.19,21.16 50.55,20.8 51.6,20.8 52.7,21.9 52.7,22.45 v52.75,22.5 | R15.2 84.41,15.24 v83.35,16.3
  Bottom 0.406: v83.35,16.3 80,16.3 76.8,19.5 62.65,19.5 59.65,22.5 v52.75,22.5
TXD  (via drill 0.5, 0.6)
  Top 0.305: 41.99,23.94 42.55,24.5 42.55,26.35 43.4,27.2 43.4,31.25 43.55,31.4 44.05,31.9 v50.85,31.9
  Top 0.406: U$1.44 41.99,23.94 | U$9.11 85.73,37.47 v85.75,37.45
  Bottom 0.406: v85.75,37.45 86,37.2 86,34.15 84.87,33.02 78.74,33.02 69.85,24.13 62.17,24.13 54.4,31.9 v50.85,31.9
USB_CS
  Top 0.305: U$1.40 42.39,27.14 42.75,27.5 42.75,32.2
  Top 0.406: 42.75,32.2 41.35,33.6 38.9,33.6 33.7,38.8 33.7,39.74 U$15.18
USB_D+  (via drill 0.5 pad 0.25)
  Top 0.406: U$15.10 32.38,30.73 v32.45,30.8
  Bottom 0.406: v32.45,30.8 22.54,30.8 13.97,39.37 13.24,39.37 J2.3
USB_D-  (via drill 0.5 pad 0.25)
  Top 0.406: U$15.11 v33.66,32.05 v33.65,32.05
  Bottom 0.406: v33.65,32.05 22.56,32.05 J2.2
USB_INT  (via drill 0.5, 0.6)
  Top 0.305: U$1.8 48.59,24.41 47.95,25.05 45.35,25.05 v44.42,24.12
  Top 0.406: U$15.1 20.95,25.14 21.35,24.75 21.35,20.65 v21.6,20.4
  Bottom 0.305: 40.87,20.57 v44.42,24.12
  Bottom 0.406: v21.6,20.4 40.7,20.4 40.87,20.57
USB_RST
  Top 0.406: U$15.2 22.23,21.77 26.1,17.9 36.95,17.9 37.9,18.85 37.9,25.55 38.7,26.35 U$1.41
V0  (via drill 0.6 pad 0.25)
  Top 0.406: v15.7,42.05 v15.7,30.87
  Bottom 0.406: VR1.2 15.63,21.12 15.63,30.8 v15.7,30.87 | JP1.3 15.63,42.12 v15.7,42.05
~RAM_CS  (via drill 0.5)
  Top 0.305: v47.4,29.65 47.4,28.95 48.3,28.05 52.68,28.05 U$1.17
  Top 0.406: U$4.1 13.66,26.04 14.3,25.4 14.3,20.95 11.05,17.7 11.05,6.05 12,5.1 14.45,5.1 15.5,6.15 15.5,7.5 16.55,8.55 40.1,8.55 40.7,9.15 PROGRAM.4
  Bottom 0.305: 48.6,22.8 48.6,27.85 47.4,29.05 v47.4,29.65
  Bottom 0.406: PROGRAM.4 40.69,12.75 41.91,13.97 41.91,16.51 42.95,17.55 43.95,17.55 44.6,18.2 45.3,18.2 47,19.9 47,21.2 48.6,22.8
~RESET  (via drill 0.5, 0.6)
  Top 0.406: U$1.18 54.39,28.74 v54.5,28.75 | R5.1 v26.67,12.71 v26.66,12.7 25.39,11.43 17.78,11.43 13.08,16.13 S5.2 | v29.5,6.95 29.55,6.9 29.55,6.15 30.05,5.65 34.8,5.65 35.55,6.4 38.95,6.4 39.7,5.65 47.85,5.65 48.3,6.1 v48.3,7
  Bottom 0.406: v54.5,28.75 51.95,28.75 51,27.8 51,21.95 49.53,20.48 49.53,19.18 47,16.65 47,12.49 PROGRAM.1 48.26,11.13 48.26,7.04 v48.3,7 | v29.5,6.95 29.5,9.86 v26.66,12.7